# Altium PCB BEE-1012 PAY-IF V1.0.0.PcbDoc (part 3 of 7)
Units mm, origin at the board's own origin, x right, y up, seen from the top; angles counter-clockwise.
Board outline 93 x 90 mm, 6 copper layers (Top_1, GND_2, SIGNAL_3, PWR_4, GND_5, Bottom_6), stack 1.606 mm thick; 497 components, 371 nets, 2212 pads, 1215 vias.
Unrouted connection lines stored in the file: 56.
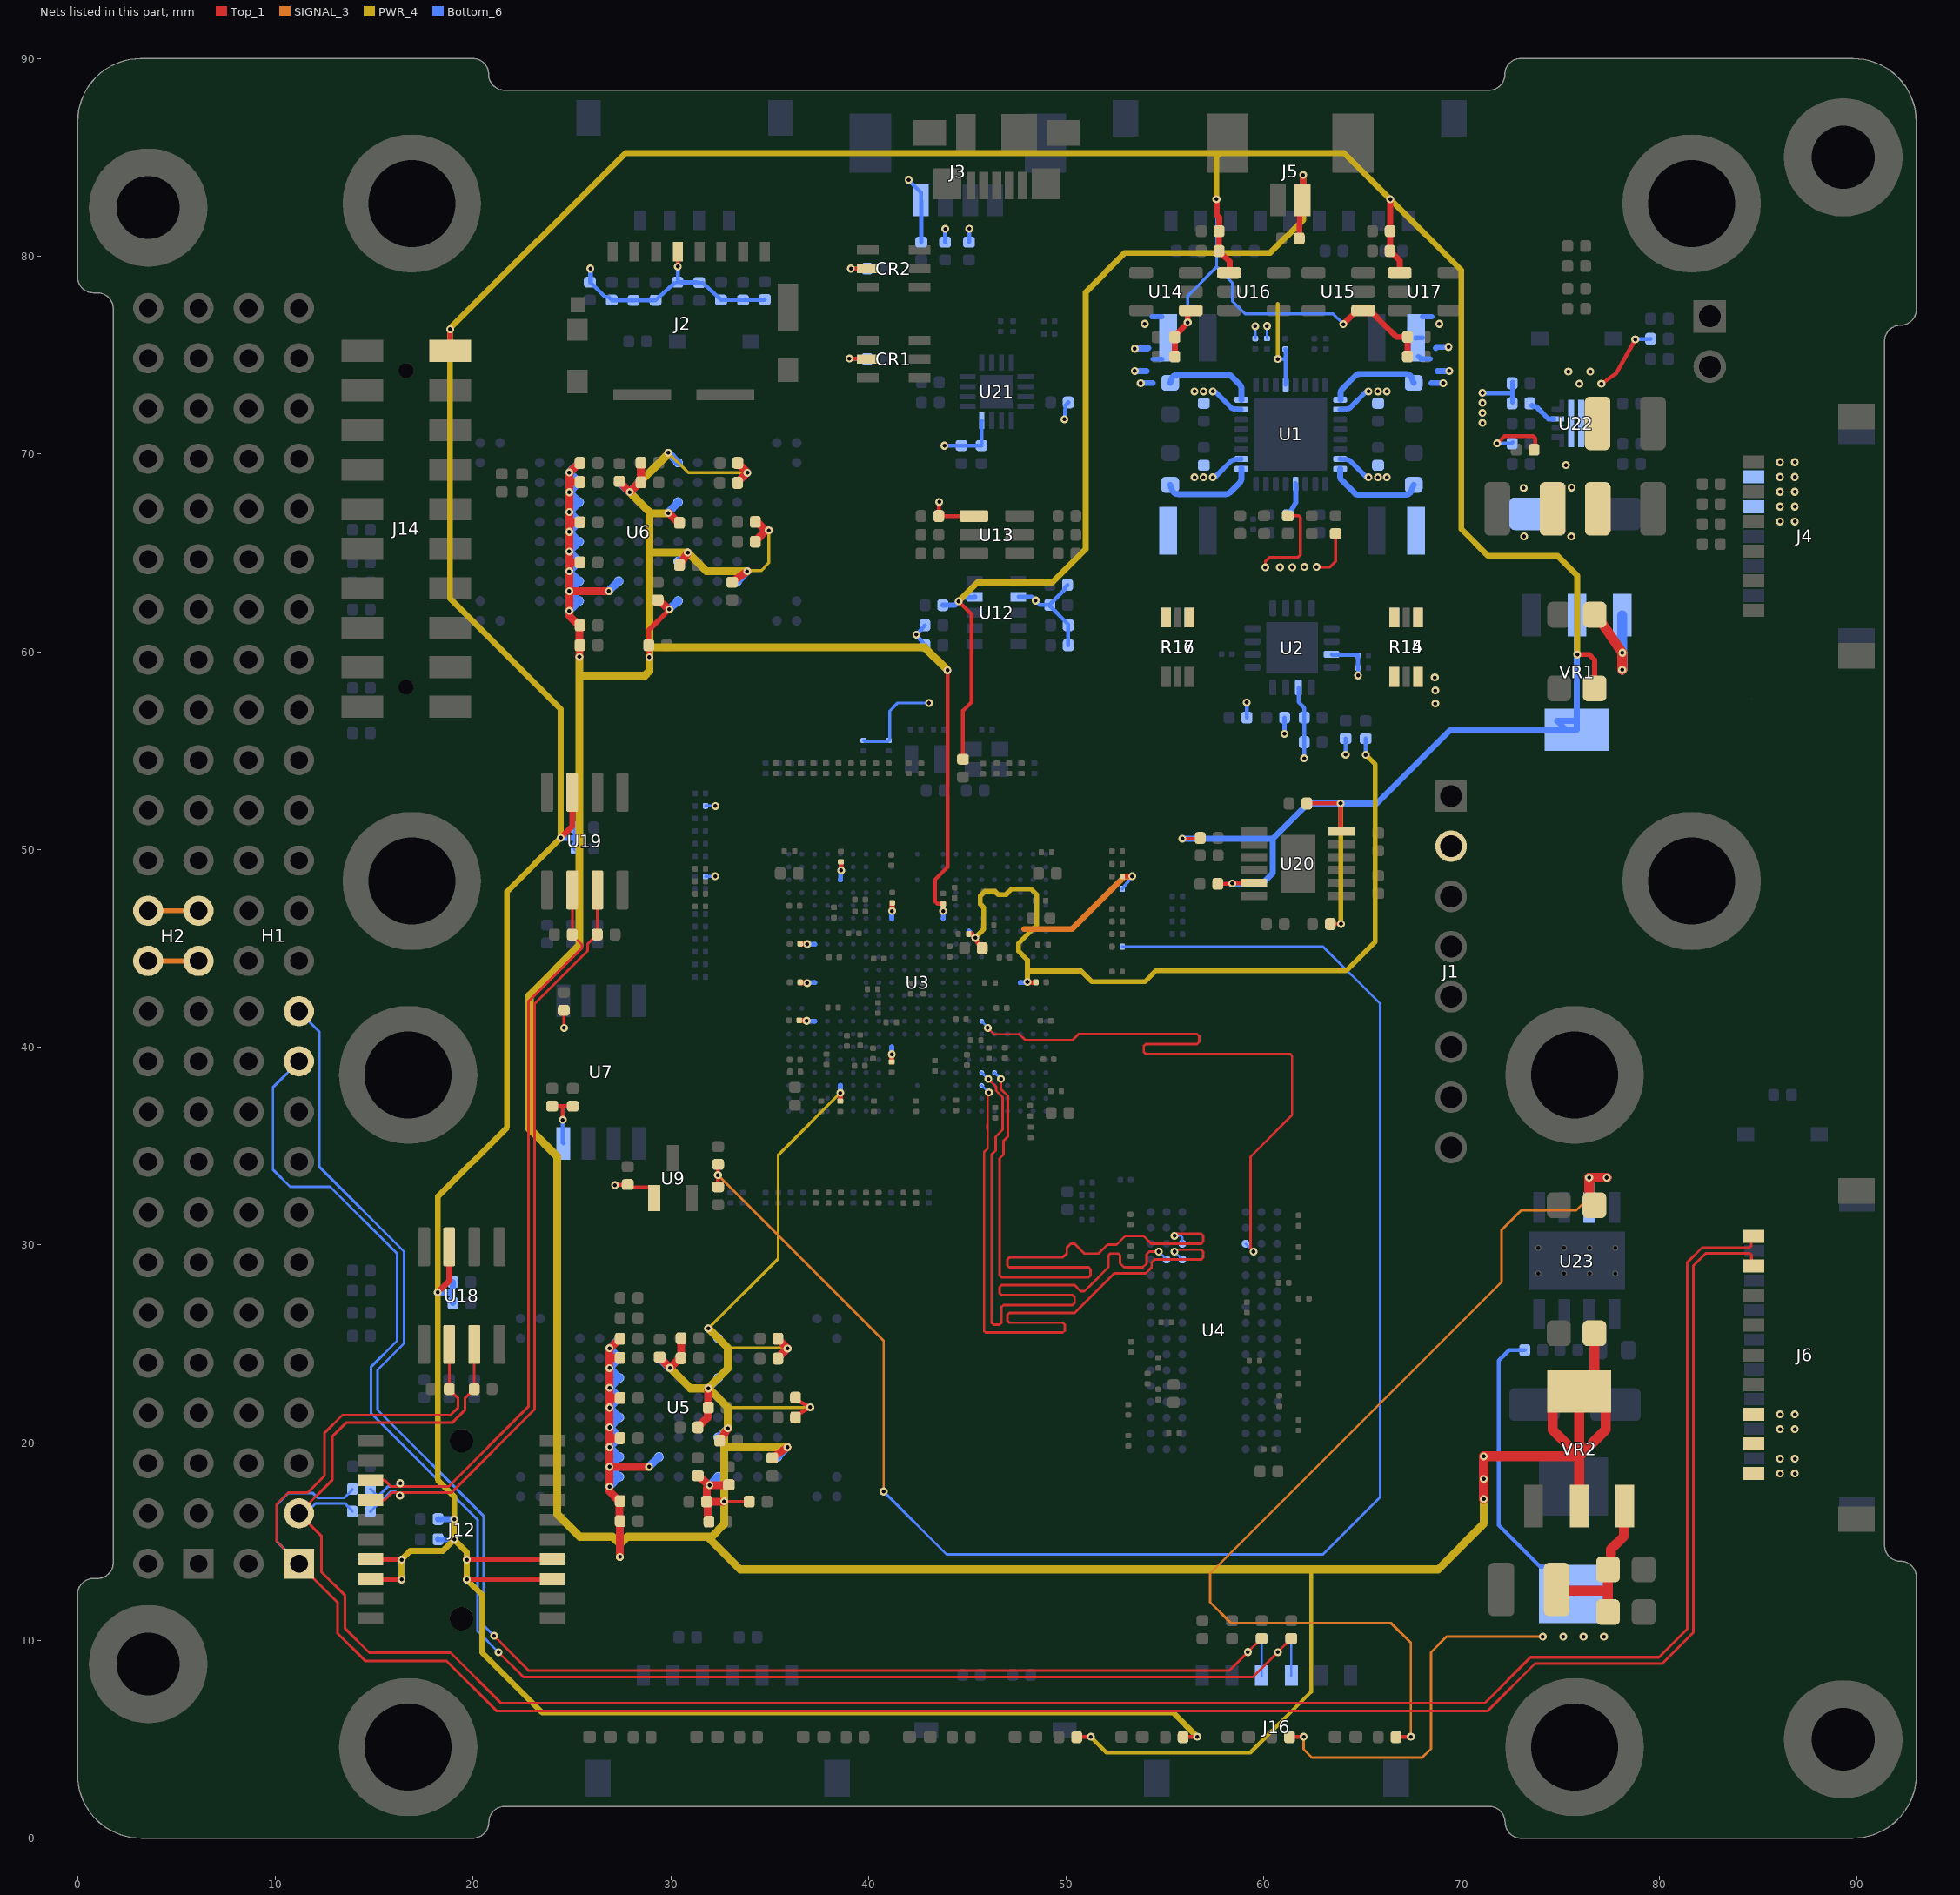
[diagram p6: the nets of this part, all layers, seen from the top]

## Via types
v1: diameter 0.4, hole 0.2, Top_1 to Bottom_6, tented both sides, 1215 vias

## Nets (pads, with @x,y where several pads share a name; then routed paths per layer and width w, separated by ;. In a path a pad name is that pad's centre, name@x,y a point inside that pad or via, vN(x,y) a via of type N, cw(c..) or ccw(c..) an arc to the next point about the centre after c; other vN are vias at no path point) (continued)
12V_CONN: (continued)
  other v1: 86.106,18.436 86.855,18.436 86.106,19.185 86.855,19.185 86.106,20.682 86.855,20.682 86.106,21.431 86.855,21.431 86.106,66.588 86.855,66.588 86.106,67.337 86.855,67.337 86.106,68.085 86.855,68.085 86.106,68.834 86.855,68.834 75.277,69.438 86.106,69.583 86.855,69.583 75.956,73.545 75.399,74.168 76.513,74.168
ADC_TEMP_1: C138.2 R90.2 R161.2 | length 87.4
  Top_1 w0.2: R161.2@32.395,32.936 C138.2@32.395,34.068
  SIGNAL_3 w0.125: v1(32.385,33.528) 40.767,25.146 v1(40.767,17.526)
  Bottom_6 w0.125: v1(40.767,17.526) 43.942,14.351 62.992,14.351 65.881,17.24 65.881,42.196 62.992,45.085 R90.2@52.84,45.085
AUXOFF: R200.1 U22.3 | length 1.4
  Bottom_6 w0.254: R200.1@73.556,72.464 73.556,72.441 73.602,72.395 73.774,72.395 74.397,71.772 U22.3@74.671,71.772
BUS_3V3: H2.27 H2.28 | length 2.5
  SIGNAL_3 w0.25: H2.28@3.57,46.9 H2.27@6.11,46.9
BUS_5V: H2.25 H2.26 | length 2.5
  SIGNAL_3 w0.25: H2.26@3.57,44.36 H2.25@6.11,44.36
CAN_A7_H: H1.03 J6.9 R178.1 R235.2 U18.7 | length 118.9
  Top_1 w0.134: U18.7@20.066,24.962 20.06,24.956 R178.1@20.06,22.708 20.046,22.708 19.601,22.263 19.601,21.666 18.944,21.009 13.579,21.009 12.871,20.301 12.871,18.101 H1.03@11.19,16.42 12.326,15.284 12.326,13.467 13.529,12.264 13.529,10.601 14.754,9.376 18.867,9.376 21.425,6.817 71.16,6.817 73.488,9.145 79.986,9.145 81.407,10.566 81.407,29.096 82.166,29.855 84.572,29.855 84.65,29.934 84.65,30.302 J6.9@84.783,30.435
  Bottom_6 w0.134: H1.03@11.19,16.42 11.541,16.42 12.049,16.927 13.509,16.927 13.901,16.535 R235.2@13.901,16.51
CAN_A7_L: H1.01 J6.8 R180.2 R234.2 U18.6 | length 125.7
  Top_1 w0.134: U18.6@18.796,24.962 R180.2@18.796,22.708 18.796,22.692 19.246,22.242 19.246,21.775 18.857,21.386 13.385,21.386 12.493,20.494 12.493,18.334 11.635,17.476 10.662,17.476 10.064,16.879 10.064,15.006 H1.01@11.19,13.88 13.138,11.932 13.138,10.368 14.538,8.968 18.65,8.968 21.183,6.435 71.325,6.435 73.718,8.827 80.156,8.827 81.725,10.396 81.725,28.951 82.342,29.569 84.583,29.569 84.662,29.49 84.662,29.056 J6.8@84.783,28.935
  Bottom_6 w0.134: H1.01@11.19,13.88 10.079,14.991 10.079,16.874 10.662,17.456 11.882,17.456 12.13,17.207 13.48,17.207 13.901,17.628 R234.2@13.901,17.653
CAN_AX_H: J12.07 R184.1 R235.1 U19.7 | length 39.8
  Top_1 w0.134: J12.07@14.83,17.1 15.527,17.1 15.891,17.464 16.302,17.464 18.897,17.464 23.114,21.681 23.114,42.197 25.805,44.889 25.805,45.231 26.269,45.695 R184.1@26.283,45.695 26.283,47.943 U19.7@26.289,47.949
  Bottom_6 w0.134: R235.1@14.801,16.51 14.814,16.51 15.81,17.506 16.091,17.506 16.273,17.323 v1(16.302,17.323)
CAN_AX_L: J12.08 R186.2 R234.1 U19.6 | length 39.3
  Top_1 w0.134: J12.08@14.83,18.1 15.527,18.1 15.847,17.78 v1@16.302,17.78 ; v1@16.302,17.926 16.318,17.909 16.318,17.78 18.766,17.78 22.798,21.812 22.798,42.302 25.504,45.008 25.504,45.194 25.019,45.679 R186.2@25.019,45.695 U19.6@25.019,47.949
  Bottom_6 w0.134: R234.1@14.801,17.653 14.814,17.653 15.138,17.33 15.249,17.33 15.692,17.773 16.075,17.773 16.249,17.947 v1(16.321,17.947)
CLK_EXP_CONNECTOR: J16.4 R240.2 | length 1.9
  Bottom_6 w0.125: J16.4@59.885,8.217 59.889,8.221 R240.2@59.889,10.091
CLK_EXP_PC104: H1.23 R221.2 | length 77
  Top_1 w0.127: v1(21.058,10.23) 21.435,9.853 21.435,9.851 22.815,8.471 58.257,8.471 v1(59.193,9.407) 59.193,9.413 59.871,10.091 R221.2@59.889,10.091
  Bottom_6 w0.127: H1.23@11.19,41.82 12.233,40.777 12.233,33.944 16.513,29.664 16.513,25.015 15.174,23.676 15.174,21.647 20.525,16.296 20.525,10.763 v1(21.058,10.23)
CS_EXP_CONNECTOR: J16.3 R239.2 | length 1.9
  Bottom_6 w0.125: J16.3@61.386,8.217 R239.2@61.386,10.091
CS_EXP_PC104: H1.21 R220.2 | length 78.9
  Top_1 w0.127: v1(21.288,9.403) 22.547,8.143 59.444,8.143 v1(60.708,9.407) 60.708,9.413 R220.2@61.386,10.091 R220.2@61.404,10.091
  Bottom_6 w0.127: H1.21@11.19,39.28 9.878,37.968 9.878,33.81 10.745,32.943 12.777,32.943 16.155,29.565 16.155,25.147 14.847,23.84 14.847,21.471 20.224,16.095 20.224,10.467 v1(21.288,9.403)
DCDC1: C2.1 L1.2 R14.1 U1.9 | length 8.1
  Bottom_6 w0.254: L1.2@67.69,75.868 L1.2@68.013,75.873 ; L1.2@67.818,74.93 67.944,74.804 68.419,74.804 ; L1.2@68.013,76.941 68.506,76.941
  Bottom_6 w0.3: U1.9@63.881,72.737 63.881,73.079 cw(c64.181,73.079) 63.968,73.291 64.638,73.96 cw(c64.85,73.748) 64.85,74.048 67.199,74.048 cw(c67.199,73.748) 67.479,73.856 67.502,73.797 C2.1@67.579,73.597 ; 68.472,73.586 v1@69.071,73.586 ; 68.693,75.362 68.744,75.413 v1@69.344,75.413 ; 68.776,74.196 v1@69.376,74.196
  other v1: 69.074,73.584 69.378,74.193 69.346,75.411 68.87,76.581
DCDC2: C5.1 L2.2 R15.1 U1.16 | length 4.8
  Bottom_6 w0.3: U1.16@63.856,69.249 63.856,68.872 ccw(c64.156,68.872) 63.943,68.659 64.577,68.026 ccw(c64.789,68.238) 64.789,67.938 67.179,67.938 ccw(c67.179,68.238) 67.459,68.13 67.502,68.241 C5.1@67.579,68.441
DCDC3: C11.1 L3.2 R16.1 U1.25 | length 4.7
  Bottom_6 w0.3: C11.1@55.26,68.441 55.337,68.241 55.366,68.166 ccw(c55.646,68.274) 55.548,67.991 ccw(c55.668,68.34) 55.668,67.971 58.076,67.971 ccw(c58.076,68.271) 58.287,68.058 58.776,68.546 ccw(c58.563,68.758) 58.863,68.758 U1.25@58.863,69.257
DCDC4: C13.1 L4.2 R17.1 U1.32 | length 7.6
  Bottom_6 w0.254: 54.339,76.941 L4.2@54.833,76.941 ; 54.402,74.795 L4.2@54.833,74.795
  Bottom_6 w0.3: v1@53.469,74.196 54.069,74.196 ; v1(53.47,75.324) 53.476,75.329 54.12,75.329 54.153,75.362 ; v1@53.774,73.586 54.374,73.586 ; C13.1@55.26,73.597 55.337,73.797 55.348,73.824 cw(c55.628,73.716) 55.628,74.016 58.154,74.016 cw(c58.154,73.716) 58.366,73.928 58.776,73.518 cw(c58.563,73.307) 58.863,73.307 U1.32@58.863,72.729
  other v1: 53.772,73.584 53.467,74.193 53.975,76.581
DDR_A0: U3.W6 U4.N3 | length 34.1
  Top_1 w0.125: v1(46.094,37.712) 46.041,37.659 46.041,37.512 46.03,37.501 46.03,36.117 46.026,36.112 46.018,36.105 46.018,35.876 46.03,35.864 46.03,34.882 45.853,34.705 45.853,25.637 45.928,25.562 49.828,25.562 49.928,25.662 49.928,25.962 49.828,26.062 47.128,26.062 47.028,26.162 47.028,26.462 47.128,26.562 50.428,26.562 52.428,28.562 54.028,28.562 54.323,28.857 54.323,29.107 54.478,29.262 54.628,29.262 56.828,29.262 56.928,29.362 56.928,29.662 56.828,29.762 55.578,29.762 v1(55.478,29.662)
  Bottom_6 w0.125: U3.W6@45.728,38.062 45.736,38.062 46.086,37.712 v1(46.094,37.712) ; v1(55.478,29.662) U4.N3@55.878,29.262
DDR_A1: U3.P6 U4.P7 | length 34
  Top_1 w0.1: v1(46.034,40.973) 46.344,40.663 46.517,40.663 46.518,40.662 46.809,40.662 46.81,40.663 47.627,40.663
  Top_1 w0.125: 47.627,40.663 47.928,40.362 50.328,40.362 50.628,40.662 56.628,40.662 56.728,40.562 56.728,40.262 56.628,40.162 54.028,40.162 53.928,40.062 53.928,39.762 54.028,39.662 61.328,39.662 61.428,39.562 61.428,36.562 59.328,34.462 59.328,29.812 v1(59.478,29.662)
  Bottom_6 w0.125: U3.P6@45.728,41.312 45.728,41.295 46.034,40.99 v1(46.034,40.973) ; U4.P7@59.078,30.062 v1(59.478,29.662)
DDR_A2: U3.V5 U4.P3 | length 34
  Top_1 w0.125: v1(46.703,38.387) 46.703,37.88 47.049,37.533 47.049,36.112 47.049,35.483 46.828,35.262 46.828,34.562 46.628,34.362 46.628,28.462 46.728,28.362 51.128,28.362 51.228,28.462 51.228,28.762 51.128,28.862 47.128,28.862 47.028,28.962 47.028,29.262 47.128,29.362 49.828,29.362 50.028,29.562 50.028,29.862 50.228,30.062 50.428,30.062 50.928,29.562 51.628,29.562 52.085,30.019 52.551,30.019 52.987,30.455 53.909,30.455 54.302,30.062 56.828,30.062 56.928,30.162 56.928,30.462 56.828,30.562 55.578,30.562 v1(55.478,30.462)
  Bottom_6 w0.125: U3.V5@46.378,38.712 v1(46.703,38.387) ; v1(55.478,30.462) 55.803,30.462 55.878,30.387 U4.P3@55.878,30.062
DDR_A3: U3.V6 U4.N2 | length 34
  Top_1 w0.125: v1(46.065,38.387) 46.457,37.995 46.457,37.801 46.793,37.465 46.793,36.112 46.793,35.827 46.428,35.462 46.428,34.762 46.228,34.562 46.228,26.062 46.328,25.962 46.628,25.962 46.728,26.062 46.728,26.862 46.828,26.962 50.328,26.962 50.428,27.062 50.428,27.362 50.328,27.462 46.728,27.462 46.628,27.562 46.628,27.862 46.728,27.962 50.428,27.962 50.728,27.662 50.928,27.662 51.328,28.062 52.128,28.862 52.128,29.462 52.228,29.562 52.628,29.562 52.728,29.462 52.728,29.062 52.928,28.862 53.878,28.862 54.064,29.048 54.064,29.1 54.066,29.101 54.066,29.524 54.203,29.662 v1(54.678,29.662)
  Bottom_6 w0.125: U3.V6@45.728,38.712 45.734,38.712 46.059,38.387 v1(46.065,38.387) ; v1(54.678,29.662) U4.N2@55.078,29.262

## Text inside footprints (layer, text, board x,y; h text height)
C56: Top Courtyard "C" at 42.489,36.933 h0.2 r90
C57: Top Courtyard "C" at 46.956,44.633 h0.2 r180
C58: Top Courtyard "C" at 38.812,40.393 h0.2 r270
C59: Top Courtyard "C" at 44.257,47.881 h0.2 r270
C60: Bottom Courtyard "C" at 47.576,54.027 h0.2 r270
C61: Bottom Courtyard "C" at 45.915,56.162 h0.2 r180
C62: Bottom Courtyard "C" at 42.313,56.162 h0.2 r180
C63: Bottom Courtyard "C" at 43.626,55.962 h0.2
C65: Top Courtyard "C" at 61.856,31.158 h0.2 r90
C66: Top Courtyard "C" at 54.556,24.108 h0.2 r270
C67: Top Courtyard "C" at 53.239,20.019 h0.2 r90
C68: Top Courtyard "C" at 53.239,21.584 h0.2 r90
C69: Top Courtyard "C" at 59.446,24.039 h0.2
C70: Top Courtyard "C" at 61.856,23.169 h0.2 r90
C71: Top Courtyard "C" at 61.856,29.558 h0.2 r90
C72: Top Courtyard "C" at 54.756,22.358 h0.2 r90
C73: Top Courtyard "C" at 60.181,19.558 h0.2
C74: Top Courtyard "C" at 53.356,31.208 h0.2 r90
C75: Top Courtyard "C" at 53.356,29.608 h0.2 r90
C76: Top Courtyard "C" at 54.981,25.983 h0.2
C77: Top Courtyard "C" at 54.015,23.308 h0.2 r270
C78: Top Courtyard "C" at 60.684,22.176 h0.2 r270
C79: Top Courtyard "C" at 55.381,20.383 h0.2
C80: Top Courtyard "C" at 59.042,26.913 h0.2 r270
C81: Top Courtyard "C" at 49.413,37.676 h0.2
C82: Top Courtyard "C" at 61.656,20.951 h0.2 r270
C83: Top Courtyard "C" at 61.661,24.928 h0.2 r270
C85: Top Courtyard "C" at 45.994,39.769 h0.2 r270
C86: Top Courtyard "C" at 45.081,39.279 h0.2 r90
C87: Top Courtyard "C" at 43.463,38.983 h0.2 r90
C88: Top Courtyard "C" at 46.798,39.783 h0.2 r270
C89: Top Courtyard "C" at 48.286,36.701 h0.2 r90
C90: Top Courtyard "C" at 44.531,36.983 h0.2 r90
C91: Top Courtyard "C" at 46.314,36.76 h0.2 r270
C92: Top Courtyard "C" at 42.031,43.033 h0.2 r270
C93: Top Courtyard "C" at 46.806,42.083 h0.2 r180
C94: Top Courtyard "C" at 41.081,41.158 h0.2
C95: Top Courtyard "C" at 42.681,43.033 h0.2 r270
C96: Top Courtyard "C" at 44.756,41.508 h0.2 r180
C97: Top Courtyard "C" at 49.181,39.483 h0.2 r180
C98: Top Courtyard "C" at 45.498,40.448 h0.2 r180
C99: Top Courtyard "C" at 49.031,41.433 h0.2 r180
C101: Bottom Courtyard "C" at 51.127,32.424 h0.2
C103: Bottom Courtyard "C" at 50.977,31.365 h0.2 r180
C104: Top Courtyard "C" at 53.185,24.913 h0.2 r270
C105: Top Courtyard "C" at 60.918,27.983 h0.2
C139: Top Courtyard "C" at 52.653,45.185 h0.2 r180
U1: Bottom Assembly "1" at 59.451,73.279 h0.76 r180
U3: Bottom Assembly "A1" at 49.278,49.087 h1
U4: Bottom Overlay "A" at 51.153,20.297 h1 r180; Bottom Overlay "T" at 52.705,32.385 h1 r180; Bottom Overlay "1" at 54.913,17.979 h1 r90; Bottom Overlay "9" at 61.313,17.979 h1 r90; Mechanical 13 "A" at 51.153,20.297 h1.27 r180; Mechanical 13 "T" at 51.153,32.297 h1.27 r180; Mechanical 13 "1" at 54.913,17.979 h1.27 r90; Mechanical 13 "9" at 61.313,17.979 h1.27 r90
U5: Bottom Overlay "A" at 22.9,29.873 h1.27 r90; Bottom Overlay "U" at 39.2,29.773 h1.27 r90; Bottom Overlay "1" at 21,25.673 h1.27; Bottom Overlay "10" at 21.2,16.573 h1.27; Bottom Assembly "A" at 23.035,30.091 h1.27 r90; Bottom Assembly "U" at 39.035,30.091 h1.27 r90; Bottom Assembly "1" at 20.71,25.638 h1.27; Bottom Assembly "10" at 20.71,16.638 h1.27
U6: Bottom Overlay "A" at 20.868,74.164 h1.27 r90; Bottom Overlay "U" at 37.168,74.064 h1.27 r90; Bottom Overlay "1" at 18.968,69.964 h1.27; Bottom Overlay "10" at 19.168,60.864 h1.27; Bottom Assembly "A" at 21.003,74.382 h1.27 r90; Bottom Assembly "U" at 37.003,74.382 h1.27 r90; Bottom Assembly "1" at 18.678,69.929 h1.27; Bottom Assembly "10" at 18.678,60.929 h1.27
U20: Mechanical 13 "*" at 60.236,50 h1.27